# EAGLE board sensor (EAGLE 9.5.2)
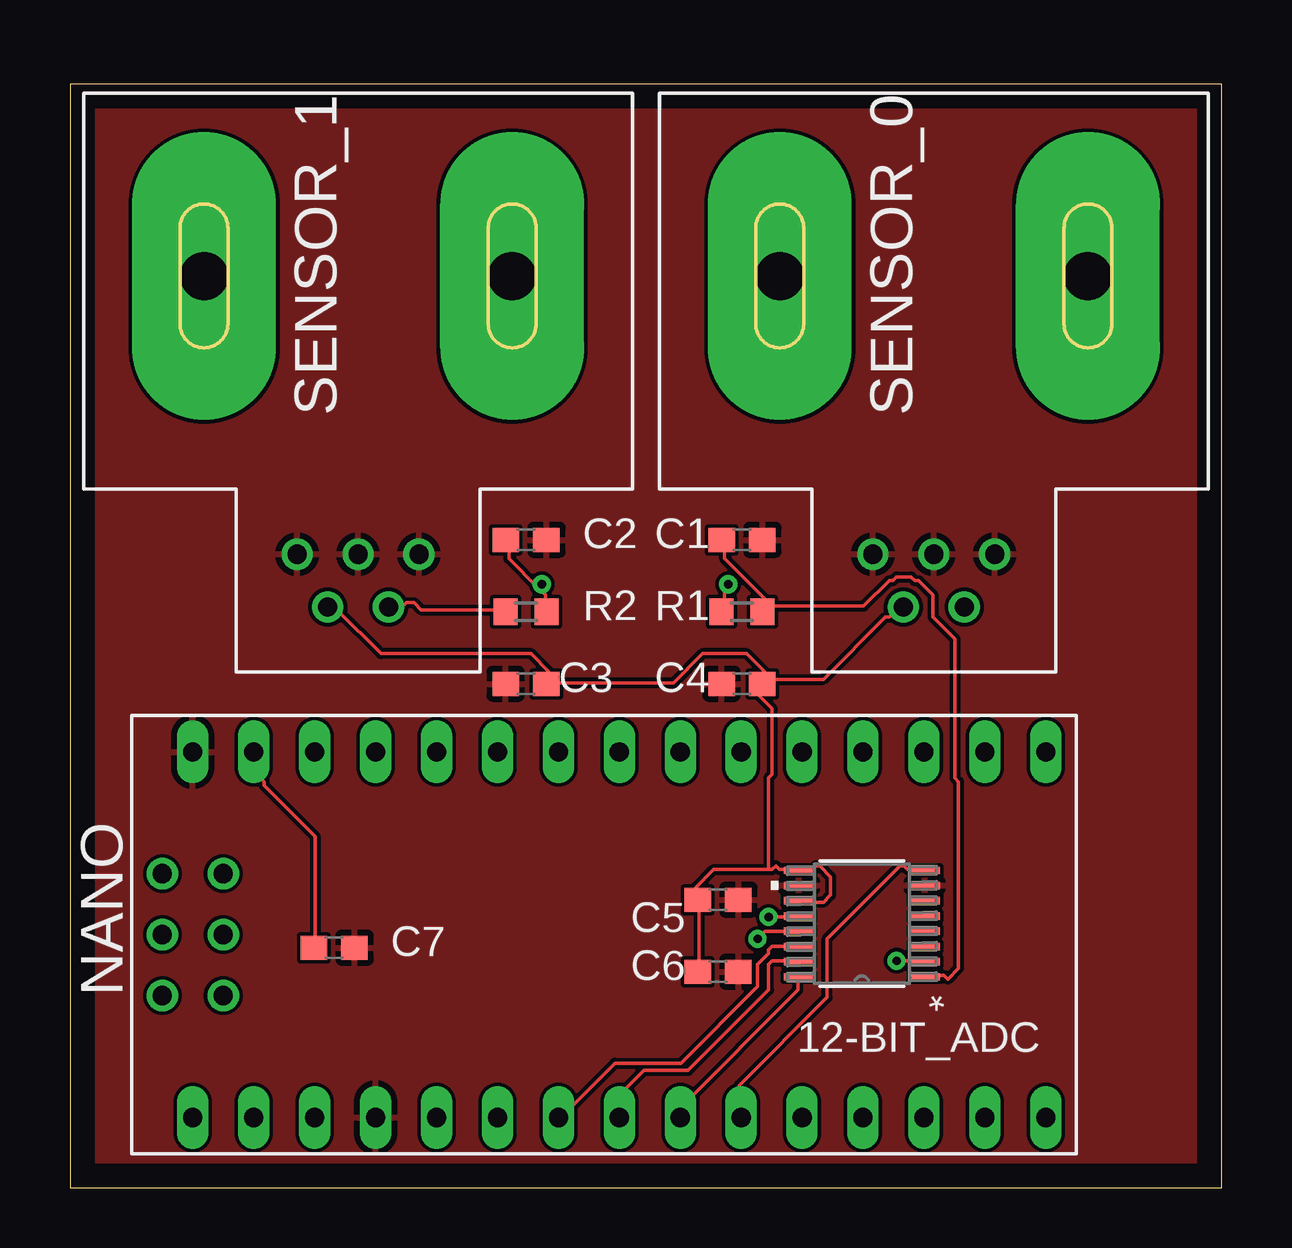
[diagram p0: board, top side]
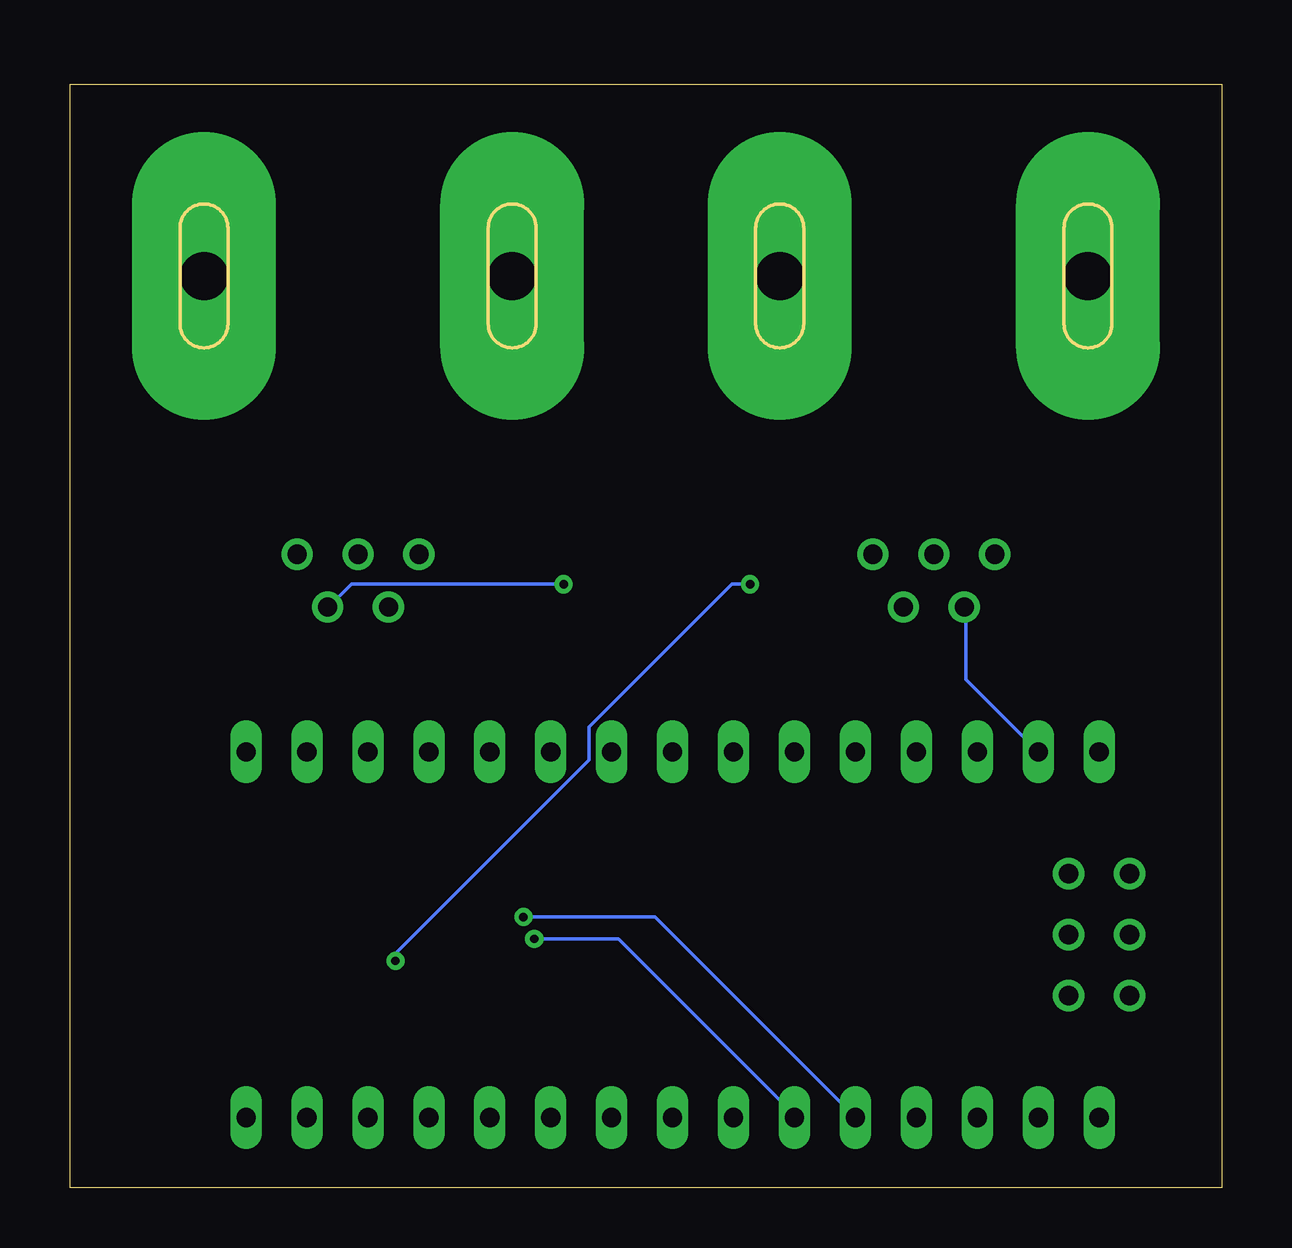
[diagram p1: board, bottom side, seen from below]

Size 48 x 46 mm. Coordinates in mm from the lower left corner, seen from the top.
Outline: 0,0 48,0 48,46 0,46 0,0
Copper layers (1*16): Top 0.035mm / dielectric 1.5mm / Bottom 0.035mm
Design rules "default": minimum track width 6mil, minimum drill 0.35mm, track to track 6mil, track to pad 6mil, pad to pad 6mil, via to via 6mil, smd to smd 6mil, copper to edge 40mil, drill to drill 6mil, minimum pad ring 10mil, minimum via ring 8mil, stop-mask expansion 4mil, vias tented up to drill 0mil, thermal gap 10mil

## Footprints (pad centres in the part's own frame; a part is rotated, then mirrored left to right if it is on the bottom)
21-0055H_16-L = smd 1.257 x 0.305: 1 -2.623,2.223; 2 -2.623,1.587; 3 -2.623,0.953; 4 -2.623,0.318; 5 -2.623,-0.318; 6 -2.623,-0.953; 7 -2.623,-1.587; 8 -2.623,-2.223; 9 2.623,-2.223; 10 2.623,-1.587; 11 2.623,-0.953; 12 2.623,-0.318; 13 2.623,0.318; 14 2.623,0.953; 15 2.623,1.587; 16 2.623,2.223
C0603 = smd 1.1 x 1: 1 -0.85,0; 2 0.85,0
R0603 = smd 1 x 1.1: 1 -0.85,0; 2 0.85,0
CQ2065 = drill 0.8: 1 -2.54,-11.6; 2 -1.27,-13.8; 3 0,-11.6; 4 1.27,-13.8; 5 2.54,-11.6 | drill 2 pad 6 long: 6 6.425,0; 7 -6.425,0
NANO = drill 0.8 long: 3.3V -10.16,24.13; 5V -10.16,-1.27; A0 -10.16,19.05; A1 -10.16,16.51; A2 -10.16,13.97; A3 -10.16,11.43; A4 -10.16,8.89; A5 -10.16,6.35; A6 -10.16,3.81; A7 -10.16,1.27; AREF -10.16,21.59; D2 5.08,1.27; D3 5.08,3.81; D4 5.08,6.35; D5 5.08,8.89; D6 5.08,11.43; D7 5.08,13.97; D8 5.08,16.51; D9 5.08,19.05; D10 5.08,21.59; D11 5.08,24.13; D12 5.08,26.67; D13 -10.16,26.67; GND -10.16,-6.35; GND1 5.08,-1.27; RAW -10.16,-8.89; RST -10.16,-3.81; RST1 5.08,-3.81; RX1 5.08,-6.35; TX0 5.08,-8.89 | drill 0.8: ICSP1 -5.08,-10.16; ICSP2 -5.08,-7.62; ICSP3 -2.54,-10.16; ICSP4 -2.54,-7.62; ICSP5 0,-10.16; ICSP6 0,-7.62

## Placement (x,y rotation side)
12-BIT_ADC  MAX11634EEE+T21-0055H_16-L  [21-0055H_16-L]  33,11 180 top
C1  CF0  [C0603]  28,27 0 top
C2  CF1  [C0603]  19,27 0 top
C3  0.1uF  [C0603]  19,21 0 top
C4  0.1uF  [C0603]  28,21 0 top
C5  0.1uF  [C0603]  27,12 0 top
C6  0.1uF  [C0603]  27,9 0 top
C7  0.1uF  [C0603]  11,10 0 top
R1  RF0  [R0603]  28,24 0 top
R2  RF1  [R0603]  19,24 0 top
SENSOR_0  CQ2065  [CQ2065]  36,38 0 top
SENSOR_1  CQ2065  [CQ2065]  12,38 0 top
U$1  NANO  [NANO]  14,8 270 top

## Library data of the parts
12-BIT_ADC = CurrentSensing; BUILT_BY: EMA_UL_Team; MANUFACTURER_PART_NUMBER: MAX11634EEE+T; VENDOR: Maxim Integrated Products
C1-C7 = rcl; SPICEPREFIX: C
R1 R2 = rcl; SPICEPREFIX: R
SENSOR_0 SENSOR_1 = CurrentSensing
U$1 = I'mRADIOactive

## Nets
!CNVST!: 12-BIT_ADC.8 U$1.D7
!CS!: 12-BIT_ADC.12 U$1.D2
!EOC!: 12-BIT_ADC.16 U$1.D6
+5V: 12-BIT_ADC.9 12-BIT_ADC.11 C3.2 C4.2 C5.1 C6.1 C7.1 SENSOR_0.2 SENSOR_1.2 U$1.GND
AIN0: 12-BIT_ADC.1 C1.1 R1.2
AIN1: 12-BIT_ADC.2 C2.1 R2.2
DIN: 12-BIT_ADC.14 U$1.D4
DOUT: 12-BIT_ADC.15 U$1.D5
GND: 12-BIT_ADC.7 12-BIT_ADC.10 C1.2 C2.2 C3.1 C4.1 C5.2 C6.2 C7.2 SENSOR_0.1 SENSOR_0.3 SENSOR_0.5 SENSOR_1.1 SENSOR_1.3 SENSOR_1.5 U$1.GND1 U$1.RAW
N$1: U$1.TX0
N$3: R2.1 SENSOR_1.4
N$5: R1.1 SENSOR_0.4
SCLK: 12-BIT_ADC.13 U$1.D3
TX_TEENSY: U$1.RX1

## Tracks (layer width: path | path; a pad name or v marks a point on that pad's centre or on a via)
!CNVST!
  Top 0.152: 12-BIT_ADC.8 35.51,13.26 34.9,13.26 34.75,13.41 34.59,13.41 31.55,10.36 31.55,7.92 27.89,4.27 27.89,3.05 U$1.D7
!CS!  (via drill 0.35)
  Top 0.152: v29.11,11.28 30.33,11.28 12-BIT_ADC.12
  Bottom 0.152: v29.11,11.28 23.62,11.28 15.39,3.05 U$1.D2
!EOC!
  Top 0.152: 12-BIT_ADC.16 30.33,8.69 30.33,8.23 25.45,3.35 25.45,3.05 U$1.D6
+5V
  Top 0.152: C7.1 10.21,10.06 10.21,14.63 8.08,16.76 8.08,16.92 7.77,17.22 7.77,18.14 U$1.GND | 12-BIT_ADC.11 30.48,11.89 31.39,11.89 31.7,12.19 31.7,12.95 31.24,13.41 31.09,13.41 30.94,13.26 30.48,13.26 12-BIT_ADC.9 30.33,13.26 29.57,13.26 29.41,13.41 29.26,13.26 29.11,13.26 | C6.1 26.21,9.14 26.21,11.89 C5.1 26.06,12.04 26.06,12.5 26.82,13.26 29.11,13.26 | 19.96,21.03 25.15,21.03 26.36,22.25 28.19,22.25 28.96,21.49 28.96,21.18 | 28.96,21.18 28.96,21.03 C4.2 | 28.96,21.18 31.39,21.18 33.98,23.77 34.14,23.77 34.44,24.08 34.59,24.08 SENSOR_0.2 | 28.96,21.18 C4.2 | 29.11,13.26 29.11,17.07 29.26,17.22 29.26,19.96 28.65,20.57 28.65,20.73 28.8,20.88 C4.2 | 19.96,21.03 19.96,21.49 19.2,22.25 12.95,22.25 11.12,24.08 10.82,24.08 SENSOR_1.2 | 19.96,21.03 C3.2
  Bottom 0.152: SENSOR_1.2 10.67,24.08 10.67,21.18 7.77,18.29 U$1.GND
AIN0
  Top 0.152: 28.96,24.23 28.96,24.08 R1.2 28.96,24.23 | 28.96,24.23 28.96,24.54 27.28,26.21 27.28,26.98 C1.1 | 28.96,24.23 33.07,24.23 34.14,25.3 34.29,25.3 34.44,25.45 35.05,25.45 35.2,25.3 35.36,25.3 35.97,24.69 35.97,23.77 36.88,22.86 36.88,17.07 37.03,16.92 37.03,9.14 36.58,8.69 36.42,8.84 35.66,8.84 12-BIT_ADC.1
AIN1  (via drill 0.35)
  Top 0.152: 19.51,24.99 18.29,26.21 18.29,26.98 C2.1 | 19.51,24.99 19.81,24.69 19.81,24.08 R2.2 | v34.44,9.45 35.51,9.45 12-BIT_ADC.2 | 19.51,24.99 v19.66,25.15
  Bottom 0.152: v34.44,9.45 34.44,9.75 26.36,17.83 26.36,19.2 20.42,25.15 v19.66,25.15
DIN
  Top 0.152: 12-BIT_ADC.14 30.33,10.06 29.26,10.06 29.11,9.91 29.11,9.75 28.65,9.3 28.65,8.38 25.45,5.18 22.71,5.18 20.42,2.9 U$1.D4
DOUT
  Top 0.152: 12-BIT_ADC.15 30.33,9.45 29.26,9.45 29.11,9.3 29.11,8.23 25.76,4.88 23.93,4.88 23.01,3.96 23.01,3.05 U$1.D5
GND
  pour Top: 0,0 48,0 48,46 0,46
N$3
  Top 0.152: R2.1 18.14,24.08 14.63,24.08 14.33,24.38 14.02,24.38 13.87,24.23 13.41,24.23 SENSOR_1.4
N$5  (via drill 0.35)
  Top 0.152: v27.43,25.15 27.28,24.99 27.28,24.08 R1.1
  Bottom 0.152: v27.43,25.15 36.27,25.15 37.19,24.23 SENSOR_0.4
SCLK  (via drill 0.35)
  Top 0.152: v28.65,10.36 28.96,10.67 30.33,10.67 12-BIT_ADC.13
  Bottom 0.152: v28.65,10.36 25.15,10.36 17.83,3.05 U$1.D3